# Altium PCB IndAlarmIf2.PCBDOC (part 1 of 2)
Units mil, origin at the board's own origin, x right, y up, seen from the top; angles counter-clockwise.
Board outline 5790 x 4460 mil, 2 copper layers (Top Layer, Bottom Layer); 118 components, 184 nets, 640 pads, 242 vias.
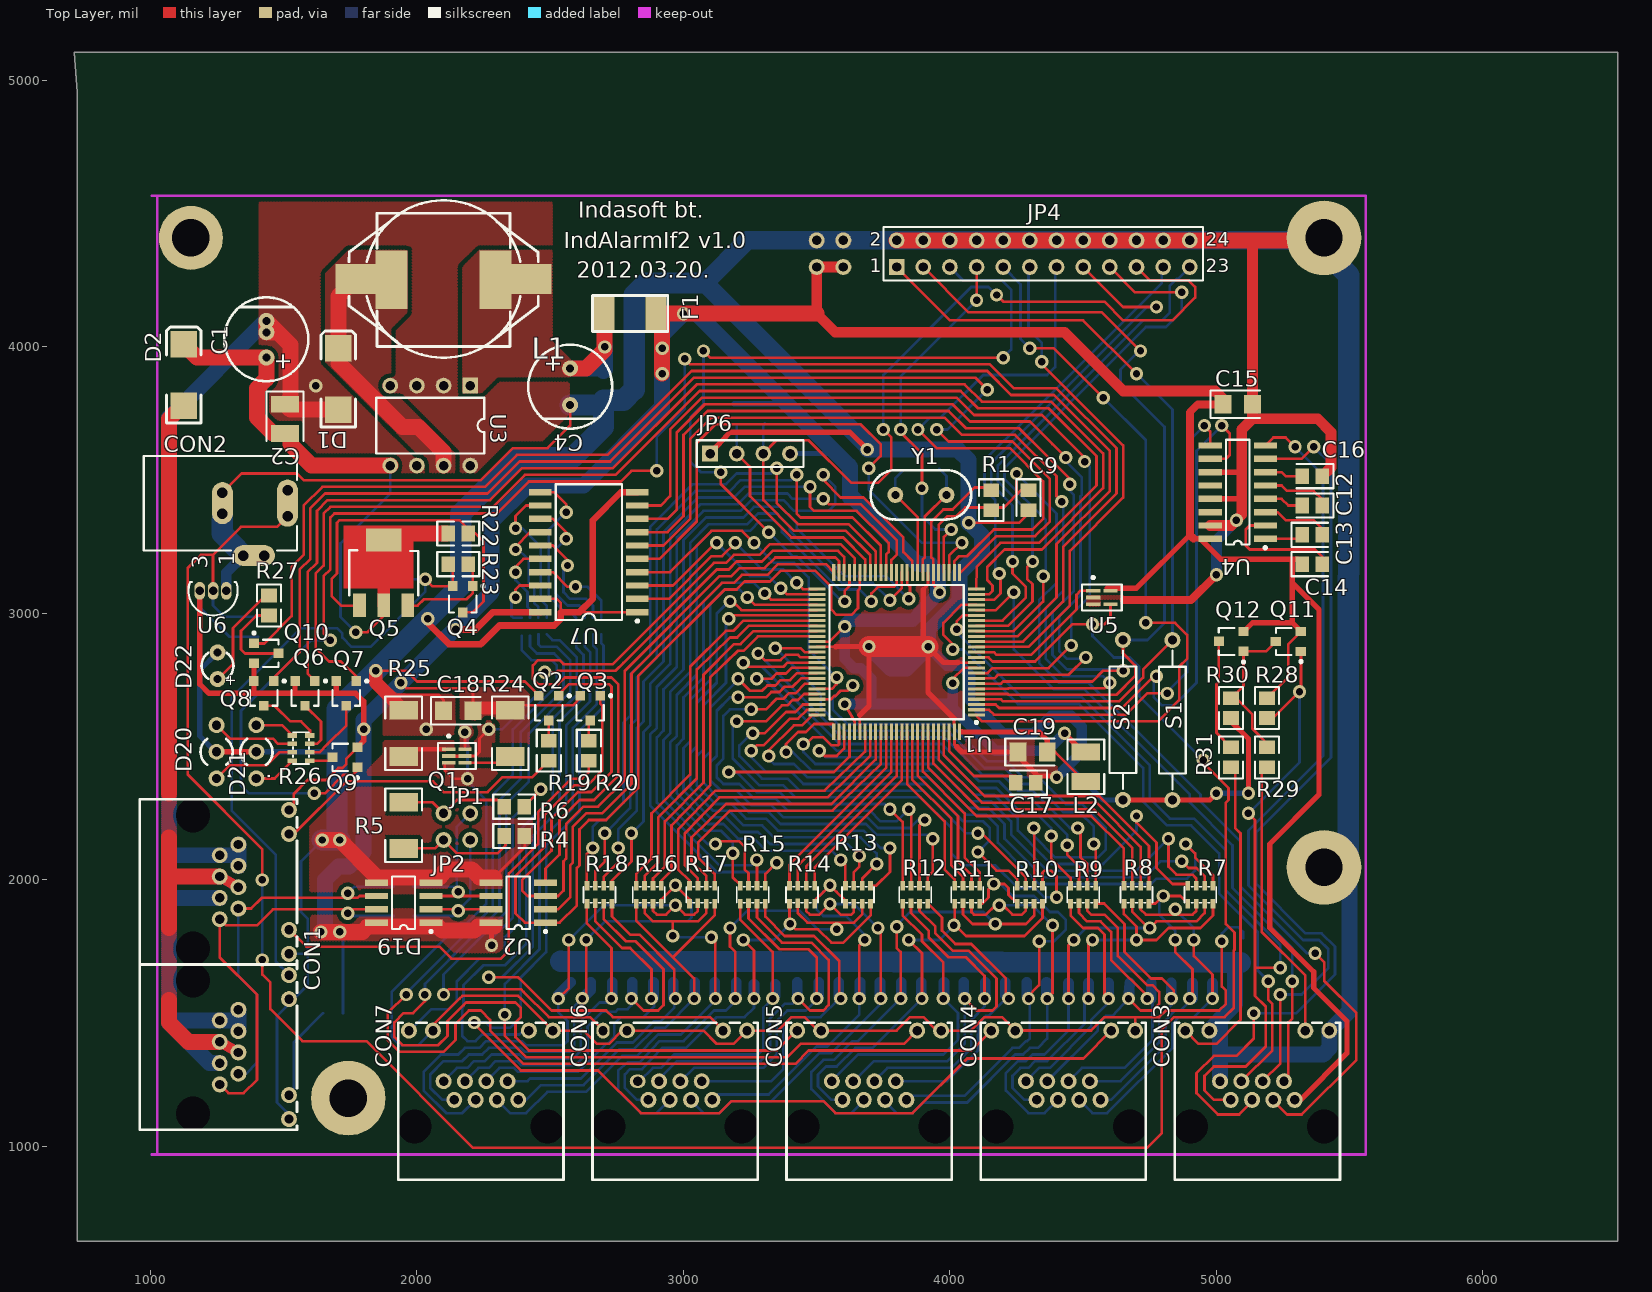
[diagram p0: Top Layer view]
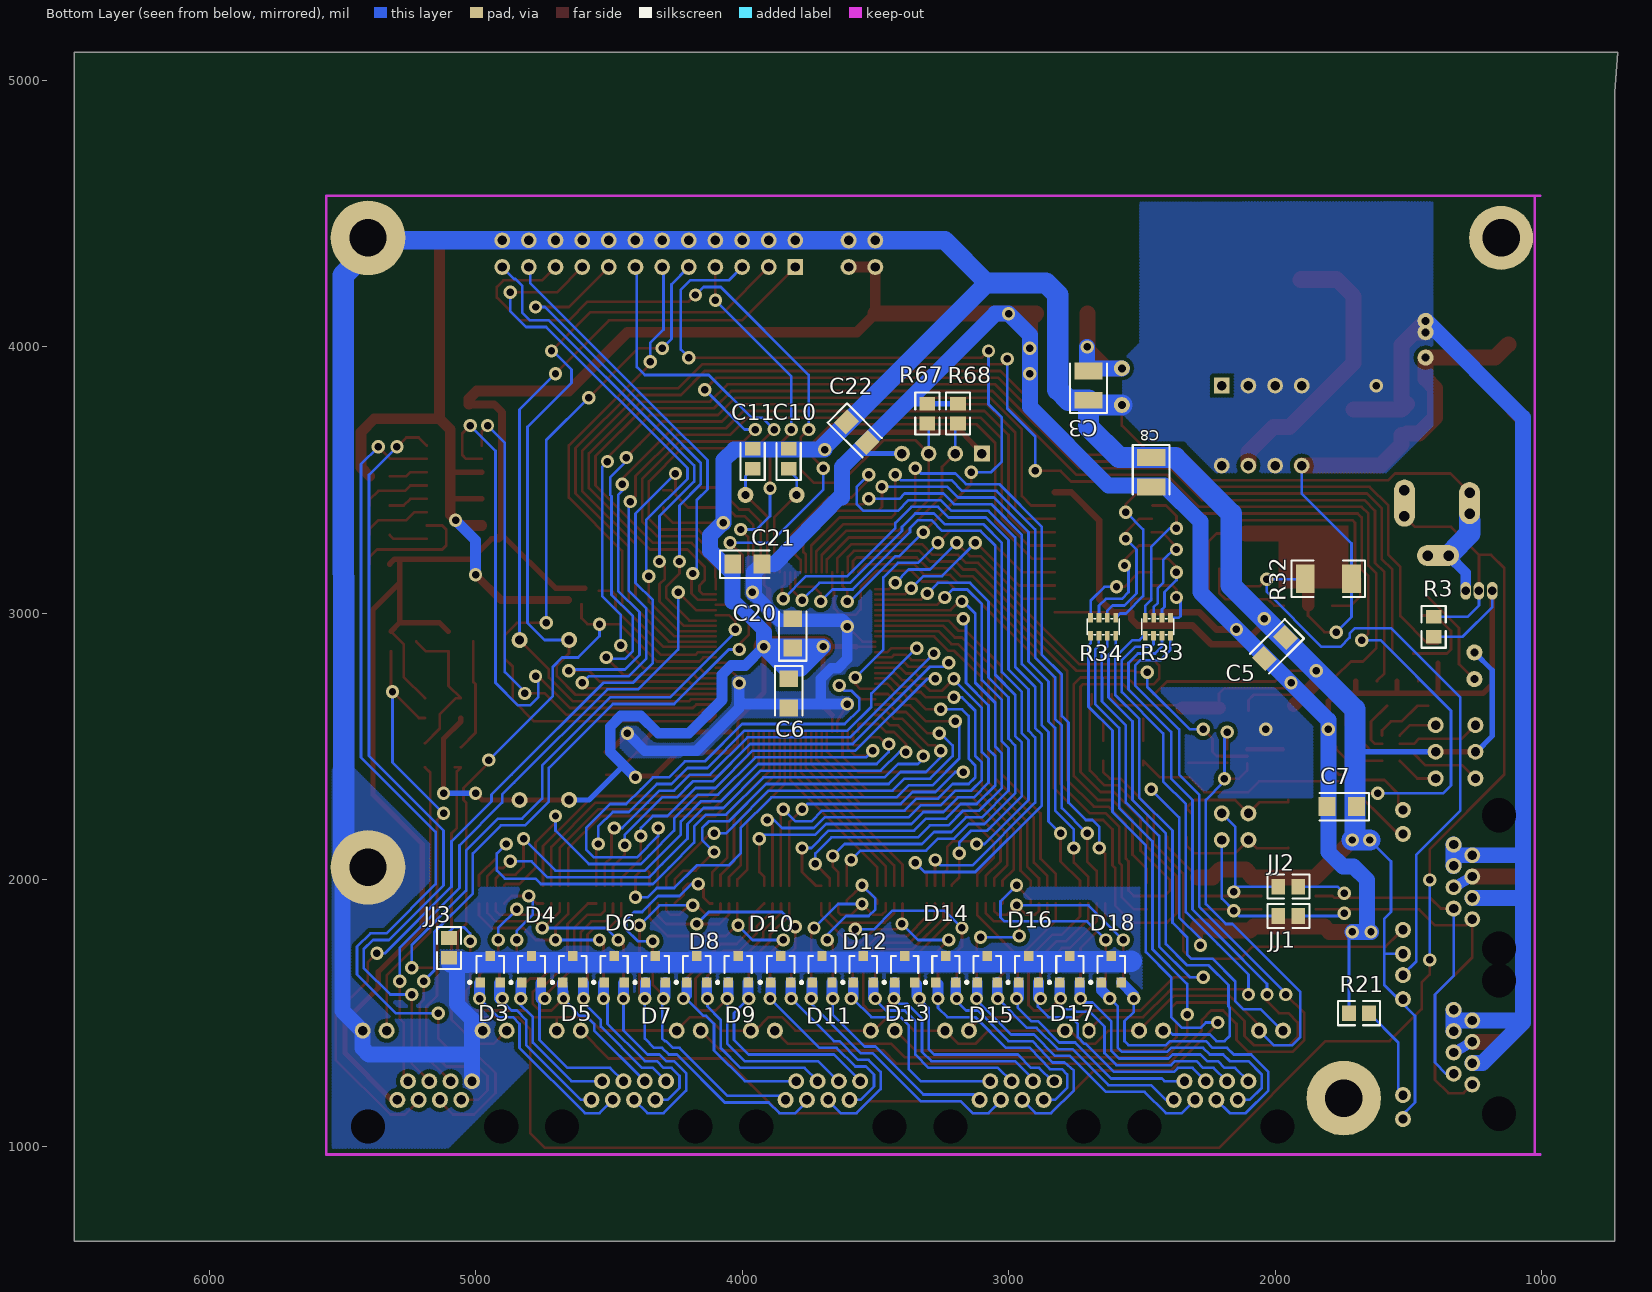
[diagram p1: Bottom Layer view, seen from below]

## Layer stack, top to bottom
Top Layer: signal copper 1.4
Dielectric: dielectric 12.6, FR-4, Dk 4.8
Bottom Layer: signal copper 1.4

## Board outline
725,4955 725,645 6505,645 6505,5105 715,5105

## Design rules (kind name [scope] priority, off if disabled: settings)
Clearance ClearanceMCU [All] p1: gap=7.5
Clearance Clearance_FILL [All] p2 off: gap=15
Clearance [All] p3 off: gap=10
ComponentClearance [All] p1: gap=10 collisioncheckmode=0
HoleSize [All] p1: absolutevalues=TRUE maxlimit=200 minlimit=1 maxpercent=80.000 minpercent=20.000
PlaneConnect [All] p1: planeconnectstyle=Direct reliefexpansion=20 reliefentries=4 reliefconductorwidth=10 reliefairgap=10
PolygonConnect [All] p1: connectstyle=Direct reliefconductorwidth=10 reliefentries=4 polygonreliefangle="90 Angle"
RoutingLayers [All] p1: top layer=Horizontal bottom layer=Vertical
RoutingVias [All] p1: holewidth=28 width=50 viastyle="Through Hole" minholewidth=28 minwidth=50 maxholewidth=28 maxwidth=50
SolderMaskExpansion [All] p1: expansion=4
TestPointUsage [All] p1: valid=0 allowmultiple=FALSE
Testpoint [All] p1: side=15 testpointundercomponent=TRUE minsize=40 maxsize=100 preferedsize=60 minholesize=0 maxholesize=40 preferedholesize=32 testpointgrid=1 style=1023 order=1234567890
UnConnectedPin [All] p1 off:
Width Power [InNetClass('Power')] p1: maxlimit=100 minlimit=10 preferedwidth=10 toplayer_prefwidth=30 bottomlayer_prefwidth=20 minimp=50.000000 maximp=50.000000 favimp=50.000000
Width [All] p2: maxlimit=40 minlimit=10 preferedwidth=10 minimp=50.000000 maximp=50.000000 favimp=50.000000
14 further rules are at their usual default settings.

## Classes and differential pairs
net class Power: GND NetC3_2 NetD1_2 U+ UIN VCC

## Components (designator, comment, footprint, x,y, rotation, side; value= is the part's Value field where it differs from the comment)
C1 "Cap Pol1" C8X11RM3.5 1435,3960 r90 top
C2 "Cap Semi" CC3225-1210 1505,3730 r270 top
C3 "Cap Semi" CC3225-1210 2700,3855 r90 bottom
C4 "Cap Pol1" C8X11RM3.5 2575,3920 r270 top
C5 "Cap Semi" CC3216-1206 2000,2870 r315 bottom
C6 "Cap Semi" CC3216-1206 3825,2700 r270 bottom
C7 "Cap Semi" CC3216-1206 1750,2275 r0 bottom
C8 "Cap Semi" CC3225-1210 2465,3530 r270 bottom
C9 "Cap Semi" CC2012-0805 4295,3425 r270 top
C10 "Cap Semi" CC2012-0805 3825,3580 r90 bottom
C11 "Cap Semi" CC2012-0805 3960,3580 r90 bottom
C12 "Cap Semi" CC2012-0805 5360,3405 r180 top
C13 "Cap Semi" CC2012-0805 5360,3295 r0 top
C14 "Cap Semi" CC2012-0805 5360,3185 r0 top
C15 "Cap Semi" CC3216-1206 5080,3785 r0 top
C16 "Cap Semi" CC2012-0805 5360,3515 r180 top
C17 "Cap Semi" CC2012-0805 4285,2365 r180 top
C18 "Cap Semi" CC3216-1206 2155,2635 r0 top
C19 "Cap Semi" CC3216-1206 4310,2480 r0 top
C20 "Cap Semi" CC3216-1206 3810,2925 r90 bottom
C21 "Cap Semi" CC3216-1206 3980,3185 r180 bottom
C22 "Cap Semi" CC3216-1206 3570,3680 r225 bottom
CON1 "RJ45U_2LED_2" RJHS-508X-2 1160,1992.76 r270 top locked
CON2 "1-Wire" KLD-0202 975,3414.02 r0 top locked
CON3 "RJHSE-5084" RJHS-508X#1 5153.54,1074.8 r0 top locked
CON4 "RJ45" RJHS-508X#1 4425.2,1074.8 r0 top locked
CON5 "RJ45" RJHS-508X#1 3696.85,1074.8 r0 top locked
CON6 "RJ45" RJHS-508X#2 2968.5,1074.8 r0 top locked
CON7 "RJ45" RJHS-508X#1 2240.16,1074.8 r0 top locked
D1 "LL5819" MELF 1705,3995 r90 top
D2 "LL5819" MELF 1125,4010 r90 top
D3 "ESDA6V1L" SO-G3/C2.5 4945,1665 r180 bottom
D4 "ESDA6V1L" SO-G3/C2.5 4790,1665 r180 bottom
D5 "ESDA6V1L" SO-G3/C2.5 4635,1665 r180 bottom
D6 "ESDA6V1L" SO-G3/C2.5 4480,1665 r180 bottom
D7 "ESDA6V1L" SO-G3/C2.5 4325,1665 r180 bottom
D8 "ESDA6V1L" SO-G3/C2.5 4170,1665 r180 bottom
D9 "ESDA6V1L" SO-G3/C2.5 4015,1665 r180 bottom
D10 "ESDA6V1L" SO-G3/C2.5 3855,1665 r180 bottom
D11 "ESDA6V1L" SO-G3/C2.5 3700,1665 r180 bottom
D12 "ESDA6V1L" SO-G3/C2.5 3545,1665 r180 bottom
D13 "ESDA6V1L" SO-G3/C2.5 3390,1665 r180 bottom
D14 "ESDA6V1L" SO-G3/C2.5 3235,1665 r180 bottom
D15 "ESDA6V1L" SO-G3/C2.5 3080,1665 r180 bottom
D16 "ESDA6V1L" SO-G3/C2.5 2925,1665 r180 bottom
D17 "ESDA6V1L" SO-G3/C2.5 2770,1665 r180 bottom
D18 "ESDA6V1L" SO-G3/C2.5 2615,1665 r180 bottom
D19 "USB6B1" NSO8 1950,1915 r90 top
D20 "LED" "LED3MM - 2" 1248.03,2480.95 r90 top locked
D21 "LED" "LED3MM - 2" 1397.64,2480.95 r90 top locked
D22 "LED" LED3MM 1251.97,2803.78 r90 top locked
F1 "500mA" MINIFUSE 2800,4125 r0 top
JJ1 "" CR2012-0805 1950,1865 r0 bottom
JJ2 "" CR2012-0805 1950,1975 r0 bottom
JJ3 "" CR2012-0805 5100,1745 r90 bottom
JP1 "Jumper" JP 2100,2250 r0 top
JP2 "Jumper" JP 2200,2150 r180 top
JP4 "Header 12X2" HDR2X12 3800,4300 r0 top
JP6 "IIC" HDR1X4 3100,3600 r0 top
L1 "Inductor" "SSL1306T - NPI27H" 2100,4255 r0 top
L2 "Inductor" CR3225-1210 4510,2425 r270 top
Q1 "Si1539" SOT363 2150,2465 r270 top
Q2 "MMUN2211" SOT-23 2495,2645 r180 top
Q3 "MMUN2111" SOT-23 2650,2645 r180 top
Q4 "BC847C" 318-08 2171.61,3053.39 r180 top
Q5 "BCP55" SOT223 1875,3275 r0 top
Q6 "MMUN2111" SOT-23 1580,2700 r180 top
Q7 "MMUN2111" SOT-23 1735,2700 r180 top
Q8 "MMUN2111" SOT-23 1425,2700 r180 top
Q9 "MMUN2111" SOT-23 1730,2460 r90 top
Q10 "MMUN2111" SOT-23 1435,2850 r270 top
Q11 "BSS84LT1" SOT23 5270,2895 r90 top
Q12 "MMUN2111" SOT-23 5055,2895 r90 top
R1 "Res Semi" CR2012-0805 4155,3425 r90 top
R3 "Res Semi" CR2012-0805 1405,2950 r270 bottom
R4 "Res Semi" CR2012-0805 2365,2165 r180 top
R5 "Res Semi" CR5025-2010 1950,2205 r90 top
R6 "Res Semi" CR2012-0805 2365,2275 r180 top
R7 "470" YC164 4940,1945 r0 top
R8 "470" YC164 4700,1945 r180 top
R9 "22" YC164 4500,1945 r180 top
R10 "470" YC164 4300,1945 r0 top
R11 "470" YC164 4065,1945 r180 top
R12 "22" YC164 3870,1945 r180 top
R13 "470" YC164 3655,1945 r0 top
R14 "470" YC164 3445,1945 r180 top
R15 "22" YC164 3260,1945 r180 top
R16 "470" YC164 2870,1945 r0 top
R17 "470" YC164 3070,1945 r180 top
R18 "22" YC164 2685,1945 r180 top
R19 "470" CR2012-0805 2495,2485 r90 top
R20 "470" CR2012-0805 2645,2485 r90 top
R21 "680" CR2012-0805 1685,1500 r0 bottom
R22 "2k2" CR2012-0805 2155,3300 r180 top
R23 "68" CR2012-0805 2155,3185 r0 top
R24 "Res Semi" CR5025-2010 2350,2550 r90 top
R25 "Res Semi" CR5025-2010 1950,2550 r270 top
R26 "330" YC164 1565,2495 r270 top
R27 "Res Semi" CR2012-0805 1445,3030 r270 top
R28 "Res Semi" CR2012-0805 5190,2645 r90 top
R29 "Res Semi" CR2012-0805 5190,2460 r90 top
R30 "Res Semi" CR2012-0805 5055,2645 r90 top
R31 "Res Semi" CR2012-0805 5055,2460 r90 top
R32 "Res Semi" CR5025-2010 1800,3130 r0 bottom
R33 "220" YC164 2440,2950 r0 bottom
R34 "220" YC164 2645,2950 r0 bottom
R67 "Res Semi" CR2012-0805 3305,3750 r90 bottom
R68 "Res Semi" CR2012-0805 3190,3750 r90 bottom
S1 "SW-SPST" AXIAL-0.6 4835,2600 r270 top
S2 "SW-SPST" AXIAL-0.6 4649.28,2600.72 r270 top
U1 "*" TQFP100 3800,2855 r180 top
U2 "MAX1487CSA" NSO8 2380,1915 r90 top
U3 "LM2574N-5" 626-05 2050,3705 r180 top
U4 "DS232AR-N" SOIC16N 5080,3455 r90 top
U5 "74AHC1G125" SOT353 4570,3060 r270 top
U6 "DS18S20" PR35 1235,3085 r90 top
U7 "SN74HC540DW" DW020 2645,3230 r90 top
Y1 "XTAL" HC49 3795,3445 r0 top

## Footprints (in the part's own frame and the unit in brackets; to place one, negate y for a bottom-side part, rotate by r counter-clockwise, add the part's x,y. Pads: shape width x height; smd on the part's side, far side on the other; paste and mask are expansions set on the pad)
318-08 [mm] "SOT-23; 3 Leads; Body 3.0 x 2.6 mm, inc. leads (LxW max)"
  rect 0.9x0.95 smd: 1(-0.95,-1.25) 2(0.95,-1.25) 3(0,1.25)
  silkscreen extent -2.08,-1.37 1.3,1.25
626-05 [mm] "DIP; 8 Leads; Row Spacing 7.62 mm; Pitch 2.54 mm"
  rect 1.5x1.5 hole 0.9: 1(-3.81,-3.81)
  round 1.5 hole 0.9: 2(-1.27,-3.81) 3(1.27,-3.81) 4(3.81,-3.81) 5(3.81,3.81) 6(1.27,3.81) 7(-1.27,3.81) 8(-3.81,3.81)
  silkscreen extent -5.15,-2.65 5.15,2.65
AXIAL-0.6 [mil]
  round 60 hole 33.47: 1(-300,0) 2(300,0)
  silkscreen extent -260,-50 260,50
C8X11RM3.5 [mil]
  round 60 hole 30: 1(0,0) 2(137.8,0)
  silkscreen extent -89,-157 226,157
CC2012-0805 [mm]
  rect 1.3x1.5 smd: 1(-0.95,0) 2(0.95,0)
  silkscreen extent -2,-1.15 1.5,1.15
CC3216-1206 [mm]
  rect 1.6x1.8 smd: 1(-1.4,0) 2(1.4,0)
  silkscreen extent -2.6,-1.3 2.1,1.3
CC3225-1210 [mm]
  rect 1.6x2.7 smd: 1(-1.4,0) 2(1.4,0)
  silkscreen extent -2.6,-1.75 2.1,1.75
CR2012-0805 [mm]
  rect 1.3x1.5 smd: 1(-0.95,0) 2(0.95,0)
  silkscreen extent -2,-1.15 2,1.15
CR3225-1210 [mm]
  rect 1.6x2.7 smd: 1(-1.4,0) 2(1.4,0)
  silkscreen extent -2.6,-1.75 2.6,1.75
CR5025-2010 [mm]
  rect 1.8x2.7 smd: 1(-2.2,0) 2(2.2,0)
  silkscreen extent -3.5,-1.75 3.5,1.75
DW020 [mm] "Plastic Small Outline; 20 Leads; Body Width 7.5 mm"
  rect 0.6x2.15 smd: 1(-5.715,-4.625) 2(-4.445,-4.625) 3(-3.175,-4.625) 4(-1.905,-4.625) 5(-0.635,-4.625) 6(0.635,-4.625) 7(1.905,-4.625) 8(3.175,-4.625) 9(4.445,-4.625) 10(5.715,-4.625) 11(5.715,4.625) 12(4.445,4.625) 13(3.175,4.625) 14(1.905,4.625) 15(0.635,4.625) 16(-0.635,4.625) 17(-1.905,4.625) 18(-3.175,4.625) 19(-4.445,4.625) 20(-5.715,4.625)
  silkscreen extent -6.69,-4.75 6.47,3.15
HC49 [mil]
  round 60 hole 30: 1(0,0) 2(192.13,0)
  silkscreen extent -93,-93 285,93
HDR1X4 [mm] "Connector; Header; 4 Position"
  rect 1.5x1.5 hole 0.9: 1(0,0)
  round 1.5 hole 0.9: 2(2.54,0) 3(5.08,0) 4(7.62,0)
  silkscreen extent -1.27,-1.27 8.89,1.27
HDR2X12 [mm] "Connector; Header; 12x2 Position"
  rect 1.5x1.5 hole 0.9: 1(0,0)
  round 1.5 hole 0.9: 2(0,2.54) 3(2.54,0) 4(2.54,2.54) 5(5.08,0) 6(5.08,2.54) 7(7.62,0) 8(7.62,2.54) 9(10.16,0) 10(10.16,2.54) 11(12.7,0) 12(12.7,2.54) 13(15.24,0) 14(15.24,2.54) 15(17.78,0) 16(17.78,2.54) 17(20.32,0) 18(20.32,2.54) 19(22.86,0) 20(22.86,2.54) 21(25.4,0) 22(25.4,2.54) 23(27.94,0) 24(27.94,2.54)
  silkscreen extent -1.27,-1.27 29.21,3.81
JP [mil]
  round 60 hole 35: 1(0,0) 2(100,0)
KLD-0202 [mm] "DC Power Jack, 2.5mm, KLD Series, PCB Mount"
  oval 2x4.5 all layers, no hole: 1(13.7,0)
  round 1.5 hole 1: 1A(13.7,-1.25) 1B(13.7,1.25) 2A(7.5,-1) 2B(7.5,1) 3A(9.5,-5) 3B(11.5,-5)
  oval 2x4 all layers, no hole: 2(7.5,0)
  oval 4x2 all layers, no hole: 3(10.5,-5)
  silkscreen extent 0,-4.5 14.6,4.5
LED3MM [mil]
  round 60 hole 30: 1(-50,0) 2(50,0)
  silkscreen extent -49,-60 48,60
"LED3MM - 2" [mil]
  round 60 hole 35: 1(-100,0) 2(100,0) 3(0,0)
  silkscreen extent -49,-61 48,60
MELF [mil]
  rect 100x100 smd: 1(-230,0) 2(0,0)
  silkscreen extent -295,-65 65,65
MINIFUSE [mil]
  rect 77x124 smd: 1(-96.5,0) 2(96.5,0)
  silkscreen extent -141,-67 141,68
NSO8 [mm] "Small Outline; 8 Leads; Body Width 3.9 mm; Pitch 1.27 mm"
  rect 0.6x2.2 smd: 1(-1.905,-2.6) 2(-0.635,-2.6) 3(0.635,-2.6) 4(1.905,-2.6) 5(1.905,2.6) 6(0.635,2.6) 7(-0.635,2.6) 8(-1.905,2.6)
  silkscreen extent -2.88,-2.72 2.5,1.1
PR35 [mm] "TO, Flat Index; 3 In-Line, Axial Leads; Body Dia. 4.6mm; Leads 0.56 x 0.51 mm (max)"
  oval 1.7x1 hole 0.8: 1(0,-1.27) 2(0,0) 3(0,1.27)
  silkscreen extent -2.34,-2.35 0.85,2.35
RJHS-508X#1 [mil] "RJ45 2 LED"
  round 0 hole 128: 0(-250,0) 0(250,0)
  round 60 hole 35: 1(140,100) 2(100,170) 3(60,100) 4(20,170) 5(-20,100) 6(-60,170) 7(-100,100) 8(-140,170) 9(270,360) 10(180,360) 11(-180,360) 12(-270,360)
  silkscreen extent -310,-200 310,390
RJHS-508X#2 [mil] "RJ45 2 LED"
  round 0 hole 128: 0(-250,0) 0(250,0)
  round 60 hole 35: 1(140,100) 2(100,170) 3(60,100) 4(20,170) 5(-20,100) 6(-60,170) 7(-100,100) 9(270,360) 10(180,360)
  oval 60x50 hole 35: 8(-140,170)
  oval 60x55 hole 35: 11(-180,360)
  oval 50x60 hole 35: 12(-270,360)
  silkscreen extent -310,-200 310,390
RJHS-508X-2 [mil]
  round 0 hole 128: 0(-250,0) 0(250,0) 0(370,0) 0(870,0)
  round 60 hole 35: 1(140,100) 1B(760,100) 2(100,170) 2B(720,170) 3(60,100) 3B(680,100) 4(20,170) 4B(640,170) 5(-20,100) 5B(600,100) 6(-60,170) 6B(560,170) 7(-100,100) 7B(520,100) 8(-140,170) 8B(480,170) 9(270,360) 9B(890,360) 10(180,360) 10B(800,360) 11(-180,360) 11B(440,360) 12(-270,360) 12B(350,360)
  silkscreen extent -310,-200 930,390
SO-G3/C2.5 [mm]
  rect 0.9x0.95 smd: 1(-0.95,-1.25) 2(0.95,-1.25) 3(0,1.25)
  silkscreen extent -2.08,-1.37 1.3,1.25
SOIC16N [mm] "Small Outline; 16 Leads; Body Width 3.9 mm; Pitch 1.27 mm"
  rect 0.6x2.2 smd: 1(-4.445,-2.625) 2(-3.175,-2.625) 3(-1.905,-2.625) 4(-0.635,-2.625) 5(0.635,-2.625) 6(1.905,-2.625) 7(3.175,-2.625) 8(4.445,-2.625) 9(4.445,2.625) 10(3.175,2.625) 11(1.905,2.625) 12(0.635,2.625) 13(-0.635,2.625) 14(-1.905,2.625) 15(-3.175,2.625) 16(-4.445,2.625)
  silkscreen extent -5.42,-2.75 5,1.13
SOT23 [mm] "SOT-23; 3 Leads; Body 3.0 x 2.5 mm, inc. leads (LxW max)"
  rect 0.85x1 smd: 1(-0.95,-1.2) 2(0.95,-1.2) 3(0,1.2)
  silkscreen extent -2.05,-1.32 1.28,1.2
SOT223 [mm]
  rect 1.2x2.2 smd: 1(-2.3,-6.2) 2(0,-6.2) 3(2.3,-6.2)
  rect 3.4x2.2 smd: 2(0,0)
  silkscreen extent -3.28,-5.28 3.3,-0.97
SOT353 [mm] "SOT-353/SC-88A; 5 Leads; Body 2.2 x 2.2 mm, inc. leads (LxW max)"
  rect 0.35x1.35 smd: 1(-0.65,-0.825) 2(0,-0.825) 3(0.65,-0.825) 4(0.65,0.825) 5(-0.65,0.825)
  silkscreen extent -2.02,-1.9 1.25,1.9
SOT363 [mm] "SOT-363/SC-88; 6 Leads; Body 2.2 x 2.2 mm, inc. leads (LxW max)"
  rect 0.35x1.25 smd: 1(-0.65,-0.775) 2(0,-0.775) 3(0.65,-0.775) 4(0.65,0.775) 5(0,0.775) 6(-0.65,0.775)
  silkscreen extent -2.02,-1.8 1.25,1.8
SOT-23 [mm] "SOT-23; 3 Leads; Body 3.1 x 2.5 mm, inc. leads (LxW max)"
  rect 0.9x0.95 smd: 1(-0.95,-1.175) 2(0.95,-1.175) 3(0,1.175)
  silkscreen extent -2.07,-1.3 1.3,1.18
"SSL1306T - NPI27H" [mil]
  rect 150x114.17 smd: 1(-330,0) 2(330,0)
  rect 120x220 smd: 1(-195,-3) 2(195,-3)
  silkscreen extent -355,-295 356,295
TQFP100 [mm] "100-Pin Plastic Thin Quad Flat Pack (TQFP)"
  rect 1.6x0.3 smd: 1(-7.6,6) 2(-7.6,5.5) 3(-7.6,5) 4(-7.6,4.5) 5(-7.6,4) 6(-7.6,3.5) 7(-7.6,3) 8(-7.6,2.5) 9(-7.6,2) 10(-7.6,1.5) 11(-7.6,1) 12(-7.6,0.5) 13(-7.6,0) 14(-7.6,-0.5) 15(-7.6,-1) 16(-7.6,-1.5) 17(-7.6,-2) 18(-7.6,-2.5) 19(-7.6,-3) 20(-7.6,-3.5) 21(-7.6,-4) 22(-7.6,-4.5) 23(-7.6,-5) 24(-7.6,-5.5) 25(-7.6,-6) 51(7.6,-6) 52(7.6,-5.5) 53(7.6,-5) 54(7.6,-4.5) 55(7.6,-4) 56(7.6,-3.5) 57(7.6,-3) 58(7.6,-2.5) 59(7.6,-2) 60(7.6,-1.5) 61(7.6,-1) 62(7.6,-0.5) 63(7.6,0) 64(7.6,0.5) 65(7.6,1) 66(7.6,1.5) 67(7.6,2) 68(7.6,2.5) 69(7.6,3) 70(7.6,3.5) 71(7.6,4) 72(7.6,4.5) 73(7.6,5) 74(7.6,5.5) 75(7.6,6)
  rect 0.3x1.6 smd: 26(-6,-7.6) 27(-5.5,-7.6) 28(-5,-7.6) 29(-4.5,-7.6) 30(-4,-7.6) 31(-3.5,-7.6) 32(-3,-7.6) 33(-2.5,-7.6) 34(-2,-7.6) 35(-1.5,-7.6) 36(-1,-7.6) 37(-0.5,-7.6) 38(0,-7.6) 39(0.5,-7.6) 40(1,-7.6) 41(1.5,-7.6) 42(2,-7.6) 43(2.5,-7.6) 44(3,-7.6) 45(3.5,-7.6) 46(4,-7.6) 47(4.5,-7.6) 48(5,-7.6) 49(5.5,-7.6) 50(6,-7.6) 76(6,7.6) 77(5.5,7.6) 78(5,7.6) 79(4.5,7.6) 80(4,7.6) 81(3.5,7.6) 82(3,7.6) 83(2.5,7.6) 84(2,7.6) 85(1.5,7.6) 86(1,7.6) 87(0.5,7.6) 88(0,7.6) 89(-0.5,7.6) 90(-1,7.6) 91(-1.5,7.6) 92(-2,7.6) 93(-2.5,7.6) 94(-3,7.6) 95(-3.5,7.6) 96(-4,7.6) 97(-4.5,7.6) 98(-5,7.6) 99(-5.5,7.6) 100(-6,7.6)
  silkscreen extent -7.73,-6.4 6.4,6.82
YC164 [mm] "YC164 Chip Resistor array"
  rect 0.45x0.9 smd: 1(-1.2,-0.85) 2(-0.4,-0.85) 3(0.4,-0.85) 4(1.2,-0.85) 5(1.2,0.85) 6(0.406,0.838) 7(-0.4,0.85) 8(-1.2,0.85)
  silkscreen extent -1.52,-0.76 1.52,0.76

## Part data
C1 C4: "Polarized Capacitor (Radial)"
C2 C3 C5 C6 C7 C8 C9 C10 C11 C12 C13 C14 C15 C16 C17 C18 C19 C20 C21 C22: "Capacitor (Semiconductor SIM Model)"
CON2: library part PWR2.5, "Low Voltage Power Supply Connector"
CON3: library part RJ45
D1 D2: library part "D Schottky", "Schottky Diode"
D3 D4 D5 D9 D10 D11 D12 D13 D14 D15 D16 D17 D18: "DUAL TRANSIL ARRAY / FOR ESD PROTECTION"
D6: library part USB6B1
D7 D8: library part LED3, "Typical BLUE SiC LED"
D20 D21: library part 2LED_A
D22: library part LED12
F1: library part "Fuse 1", "Fuse"
JJ1 JJ2 JJ3 R7 R8 R9 R10 R11 R12 R13 R14 R15 R16 R17 R18 R19 R20 R21 R22 R23 R26: library part "Res Semi", "Semiconductor Resistor"
JP1 JP2: "Jumper Wire"
JP4: library part "Header 13X2", "Header, 13-Pin, Dual row"
JP6: library part "Header 4", "Header, 4-Pin"
Q2: library part NPNR1, "NPN Transistor"
Q3 Q6 Q7 Q8 Q9 Q10 Q12: library part PNPR1, "NPN Transistor"
Q4: library part BC847ALT1, "General Purpose Transistor NPN Silicon"
Q5: "NPN Medium Power Transistor"
Q11: library part BSS84AKS
R1 R3 R4 R5 R6 R24 R25 R27 R28 R29 R30 R31 R32 R67 R68: "Semiconductor Resistor"
R33 R34: library part RES4
S1 S2: "Single-Pole, Single-Throw Switch"
U1: library part ATMEGA1280
U2: "Low-Power, Slew-Rate-Limited RS-485/RS-422 Transceiver"
U3: "Easy Switcher 0.5A Step-Down Voltage Regulator"
U4: "Dual RS-232 Transmitter/Receiver"
U6: library part DS1820, "1-Wire Digital Thermometer"
U7: library part 74AHC1G125
Y1: "Crystal Oscillator"

## Free pads (board coordinates)
  round 240 hole 140: 0(1151.73,4409.45)
  round 60 hole 30: 0(1435,4055)
  round 280 hole 140: 0(1742.28,1181.1) 0(5403.7,2047.24) 0(5403.7,4409.45)
  round 60 hole 35.43: 0(3600,4400) 1(3500,4400) 2(3500,4300) 3(3600,4300)

## Via types
v1: diameter 50, hole 28, Top Layer to Bottom Layer, 242 vias

## Nets (pads, with @x,y where several pads share a name; then routed paths per layer and width w, separated by ;. In a path a pad name is that pad's centre, name@x,y a point inside that pad or via, vN(x,y) a via of type N, cw(c..) or ccw(c..) an arc to the next point about the centre after c; other vN are vias at no path point)
GND: C1.2 C2.1 C3.1 C4.2 C5.1 C6.1 C7.1 C8.1 C9.2 C10.2 C11.2 C15.2 C16.1 C17.1 C18.1 C19.1 C20.1 C21.1 C22.1 CON1.0@1160,1622.76 CON1.0@1160,1742.76 CON1.0@1160,2242.76 CON1.3 CON1.3B CON1.6 CON1.6B CON1.7 CON1.7B CON1.8 CON1.8B CON1.9 CON1.9B CON1.11B CON2.2 CON2.2A CON2.2B CON2.3 CON2.3A CON2.3B CON3.0@5403.54,1074.8 CON3.8 CON3.9 CON3.11 D1.1 D3.3 D4.3 D5.3 D6.3 D7.3 D8.3 D9.3 D10.3 D11.3 D12.3 D13.3 D14.3 D15.3 D16.3 D17.3 D18.3 D19.4 D19.5 D20.3 D21.3 D22.2 JJ3.1 JP4.2 JP4.4 JP4.6 JP4.8 JP4.10 JP4.12 JP4.14 JP4.16 JP4.18 JP4.20 JP4.22 JP4.24 JP6.1 pad.0@1435,4055 pad.0@3600,4400 pad.0@5403.7,2047.24 pad.0@5403.7,4409.45 pad.1 Q2.2 R4.1 R25.1 R30.1 S1.2 S2.2 U1.11 U1.32 U1.62 U1.81 U1.99 U2.5 U3.2 U3.3 U3.4 U3.6 U3.8 U4.11 U4.13 U4.15 U5.2 U5.3 U6.1 U7.1 U7.10 U7.19 | length 36821.8
  Top Layer w10: CON2.2B@1270.28,3453.39 1341.89,3525 1550,3525 1575,3500 2240,3500 2360,3620 2490,3620 2575,3705 C4.2@2575,3782.2 ; v1(1845,2785) 1960,2785 2000,2745 2405,2745 2453.74,2696.26 Q2.2@2457.6,2696.26 ; 1885,2695 2080,2695 2099.88,2675.12 C18.1@2099.88,2635 ; 2290,2010 2320,2040 2405,2125 2405,2130 R4.1@2405,2162.4 ; U7.19@2462.91,3055 2525,3055 2540,3040 2540,3005 ; 2610,3005 U7.1@2827.09,3005 ; U1.62@3500.79,2874.68 3571,2875 ; U1.81@3662.2,2555.79 3662.2,2619.09 ; 3900,2893.11 v1(3918.11,2875) v1@3917.8,2874.68 ; 4016.53,2508.47 4025,2500 ; 4032,2816 U1.11@4099.21,2815.63 ; v1(4070,3340) 4260,3340 4295,3375 C9.2@4295,3397.6 ; S1.2@4835,2280 S1.2@4835,2300 ; pad.0@5363.78,4400 pad.0@5393.7,4370.08
  Top Layer w11: 3900,3090 3918.11,3108.11 U1.32@3918.11,3154.21 ; 4016,2606 U1.99@4016.54,2555.79 4016.53,2508.47
  Top Layer w20: D20.3@1248.03,2480.95 D21.3@1397.64,2480.95 ; JP6.1@3100,3600 3175,3680 3625,3680 v1(3690,3615) ; 3571,2875 v1(3696,2876) 3696,2652.89 3662.2,2619.09 ; 3900,2893.11 3900,3090 ; 4016,2606 3917.8,2704.2 3917.8,2874.68 3976.48,2816 4032,2816 ; 4025,2500 4045,2480 C19.1@4265,2480 ; C19.1@4254.88,2480 4254.88,2465.12 4322.4,2397.6 4322.4,2390 4390,2390 v1@4400,2400 ; S2.2@4650,2300 S1.2@4835,2300 4975,2300 v1(5000,2325) ; U4.13@4976.65,3430 5095,3430 ; U4.11@4976.65,3530 5095,3530 ; R30.1@5055,2607.6 5055,2595 5120,2530 v1(5120,2325)
  Top Layer w25: v1(2040,2980) 2040,2965 2120,2885 2240,2885 2310,2955 2515,2955 2540,2980 2540,3005 2610,3005 2660,3055 2660,3350 2765,3455 U7.10@2827.09,3455
  Top Layer w30: 4654.06,3050 4905,3050 v1(5000,3145)
  Top Layer w40: U4.15@4976.65,3330 5055,3330 5095,3370 5095,3690 5135.12,3730.12 ; 5135.12,4399.88 C15.2@5135.12,3785 5135.12,3730.12 ; C16.1@5397.4,3515 5430,3547.6 5430,3680 5379.88,3730.12 5135.12,3730.12
  Top Layer w50: v1(1845,2785) 1845,2740.84 R25.1@1930.88,2654.96
  Top Layer w60: 1478.14,4054.66 1435.34,4054.66 pad.0@1435,4055 C1.2@1435,4097.8 1525,4007.8 1525,3805.12 C2.1@1505,3785.12 1525.12,3765 D1.1@1705,3765 ; v1(1645,2150) v1(1710,2150) 1850,2010 2085,2010 2110,2040 2205,2040 2235,2010 2290,2010 ; JP4.2@3800,4400 pad.0@5363.78,4400
  Top Layer w80: v1(3696,2876) v1@3917.8,2874.68
  Bottom Layer w10: CON1.11B@1537.76,1552.76 1475,1490 1475,1165.55 CON1.9B@1537.8,1102.76 ; CON1.11B@1537.8,1552.76 1590,1604.96 1590,1855 1565,1880 1565,2070 v1(1645,2150) ; CON1.9@1537.8,1722.76 1587.24,1722.76 ; v1@3917.11,2876 v1(3918.11,2875) ; 4574.25,2300 4574.25,2300.75
  Bottom Layer w20: D20.3@1248.03,2480.95 1244.06,2480.95 1185,2540 1185,2786.81 D22.2@1251.97,2853.78 ; D21.3@1397.64,2480.95 1699.06,2480.95 ; 4445.28,2429.72 4574.25,2300.75 ; 4574.25,2300 S2.2@4650,2300 ; v1(5000,2325) v1(5120,2325)
  Bottom Layer w39: U6.1@1285,3085 1285,3153.15
  Bottom Layer w40: 1285,3153.15 CON2.3A@1349.02,3217.17 ; 3910,2935 4020.12,3045.12 ; v1(3918.11,2875) 3988.11,2805 4040,2805 4075,2770 4075,2675 4200,2550 4315,2550 4380,2615 4455,2615 4495,2575 4495,2480 v1(4400,2385) ; 3918.11,2928.11 4035.12,3045.12 ; v1(5000,3145) 5000,3275 v1(5075,3350)
  Bottom Layer w60: 1070,2175 1070,3735 1432.8,4097.8 C1.2@1435,4097.8 ; 1070,2200 1070,1465 1222.24,1312.76 CON1.3B@1260,1312.76 ; 1070,2230 1070,2275 ; 1072.24,1472.76 CON1.7B@1260,1472.76 1327.76,1472.76 ; 1072.24,1932.76 CON1.3@1260,1932.76 ; 1072.76,2092.76 CON1.7@1260,2092.76 1327.76,2092.76 ; CON1.6B@1330,1432.76 CON1.8B@1330,1512.76 ; CON1.6@1330,2052.76 CON1.8@1330,2132.76 ; C3.1@2682.32,3782.2 C3.1@2700,3790 ; v1(3690,3615) 4030,3615 4070,3575 v1(4070,3340) 4073.05,3340 4120,3293.05 4120,3235 4035.12,3150.12 4035.12,3045.12 ; 3738,2835 3844,2835 ; v1@3917.11,2876 v1(3696,2876) 3778,2794 3837.11,2794 v1(3918.11,2875) 3918.11,2928.11 ; CON3.11@4973.54,1434.8 5070,1535 5070,1690 ; CON3.8@5013.54,1244.8 5013.54,1478.54 ; 5013.54,1345 5400,1345 5423.54,1368.54 CON3.9@5423.54,1434.8 5424.8,1434.8 5500,1510 5500,2170 ; pad.0@5393.7,2098.7 pad.0@5423.54,2068.86 ; pad.0@5393.7,4370.08 pad.0@5400,4363.78 ; 5500,3200 5500,3345
  Bottom Layer w70: v1@3700.18,3619.82 3080,4240 3240,4400 5394.25,4400 pad.0@5403.7,4409.45
  Bottom Layer w80: CON2.2@1270.28,3413.39 1270,3300 CON2.3A@1344.02,3222.17 ; v1(1645,2150) v1(1710,2150) ; v1@1700,2160 1700,2640 2165,3105 2165,3375 2375,3585 2585,3585 2700,3700 C3.1@2700,3790 ; 2540,1695 5030,1690 JJ3.1@5090,1690 ; C4.2@2575,3782.2 C3.1@2682.32,3782.2 ; C3.1@2700,3799.88 2774.88,3799.88 2815,3840 2815,4195 2860,4240 3080,4240 ; pad.0@5363.78,4400 5393.7,4370.08 5394.92,4370.08 5496.18,4268.82 pad.0@5495,2020
  other v1: 2035,2565 1620,3855
I\E\: U1.50 U2.2 | length 2024.2
  Top Layer w10: U2.2@2482.36,1890 2530,1890 2575,1935 2575,2055 2585,2065 2585,2200 2635,2250 2695,2250 2805,2360 2805,2775 3145,3115 3190,3115 3220,3145 3315,3145 3355,3185 3535,3185 3563.78,3156.22 U1.50@3563.78,3154.21
J0: JP4.5 U1.47 | length 3034.1
  Top Layer w10: v1(3075,3985) 3100,3960 v1(4200,3960) ; v1(3140,3530) 3140,3485 v1(3320,3305) ; v1(3605,3045) 3605,3085 3622.83,3102.83 U1.47@3622.83,3154.21
  Bottom Layer w10: v1(3075,3985) 3075,3785 3025,3735 3025,3570 3065,3530 v1(3140,3530) ; v1(3320,3305) 3410,3215 3425,3215 v1@3595,3045 ; JP4.5@4000,4300 4050,4250 4195,4250 4230,4215 4230,3995 4230,3990 v1(4200,3960)
J1: JP4.7 U1.29 | length 1389.2
  Top Layer w10: v1(3815,3690) 3815,3680 3895,3600 v1(3895,3470) ; U1.29@3977.17,3154.21 3977.17,3287.17 v1(4005,3315) ; v1(4100,4175) JP4.7@4100,4300
  Bottom Layer w10: v1(3815,3690) 3815,3890 v1(4100,4175) ; v1(3895,3470) 3895,3365 3945,3315 v1(4005,3315)
J2: JP4.9 U1.1 | length 2845.9
  Top Layer w10: U1.1@4099.21,2618.78 4099.21,2615.79 4120,2595 4780,2595 4860,2675 4860,2800 4890,2830 4890,2920 4845,2965 v1(4735,2965) ; v1(4300,3995) 4390,3995 v1(4575,3810)
  Bottom Layer w10: JP4.9@4200,4300 4265,4235 4265,4030 v1(4300,3995) ; v1(4575,3810) 4735,3650 v1(4735,2965)
J3: JP4.11 U1.14 | length 1915
  Top Layer w10: U1.14@4099.21,2874.68 4294.68,2874.68 4450,3030 4450,3235 4650,3435 4650,3630 4345,3935 v1(4345,3945)
  Bottom Layer w10: JP4.11@4295,4300 4295,4065 4345,4015 v1(4345,3945)
J4: JP4.13 U1.27 | length 2119.5
  Top Layer w10: v1(3880,3690) 3950,3620 4075,3620 4225,3620 4350,3495 4350,3355 4310,3315 4165,3315 4065,3215 4035,3215 4016.54,3196.54 U1.27@4016.54,3154.21
  Bottom Layer w10: v1(3880,3690) 3925,3735 3965,3735 4125,3895 4365,3895 4395,3925 4395,3955 JP4.13@4395,4300
J5: JP4.15 U1.19 | length 1980.1
  Top Layer w10: U1.19@4099.21,2973.11 4198.11,2973.11 4285,3060 4285,3100 4235,3150 v1(4235,3195) ; JP4.15@4500,4300 4650,4150 v1(4775,4150)
  Bottom Layer w10: v1(4235,3195) 4235,3405 4155,3485 4155,3565 4295,3705 4740,4150 v1(4775,4150)
J6: JP4.17 U1.17 | length 2154
  Top Layer w10: U1.17@4099.21,2933.74 4238.74,2933.74 4350,3045 v1(4350,3140) ; JP4.17@4600,4300 4695,4205 v1(4870,4205)
  Bottom Layer w10: v1(4350,3140) 4360,3150 4360,3350 4205,3505 4205,3545 4735,4075 4810,4075 4870,4135 v1(4870,4205)
K1: JP4.1 S1.1 U1.4 | length 2973.5
  Top Layer w10: JP4.1@3800,4300 4000,4100 4500,4100 v1(4700,3900) ; U1.4@4099.21,2677.83 4192.17,2677.83 4200,2670 4635,2670 4725,2760 4725,2790 S1.1@4835,2900
  Bottom Layer w10: v1(4700,3900) 4835,3765 S1.1@4835,2900
K2: JP4.3 S2.1 U1.5 | length 3030.6
  Top Layer w10: JP4.3@3900,4300 4070,4130 4570,4130 v1(4715,3985) ; U1.5@4099.21,2697.52 4217.48,2697.52 4220,2695 4625,2695 4695,2765 4695,2805 4649.28,2850.72 S2.1@4649.28,2900.72
  Bottom Layer w10: S2.1@4649.28,2900.72 4740.72,2900.72 4805,2965 4805,3700 4640,3865 4640,3915 4710,3985 v1(4715,3985)
LED0: Q6.1 U1.24 | length 4770.9
  Top Layer w10: Q6.1@1617.4,2746.26 1617.4,2747.6 1590,2775 1590,3155 1625,3190 1625,3385 1665,3425 2275,3425 2395,3545 2735,3545 3050,3860 3645,3860 4055,3860 4120,3795 4150,3795 4380,3795 4575,3600 4575,3470 4345,3240 4205,3240 4140,3175 4140,3125 4160,3105 4160,3085 4146.54,3071.54 U1.24@4099.21,3071.54
LED1: Q7.1 U1.25 | length 4695.5
  Top Layer w10: U1.25@4099.21,3091.22 4100,3175 4190,3265 4335,3265 4550,3480 4550,3590 4370,3770 4140,3770 4105,3770 4040,3835 3660,3835 3060,3835 2745,3520 2405,3520 2285,3400 1675,3400 1650,3375 1650,3180 1620,3150 1620,2870 1670,2820 1715,2820 1772.4,2762.6 Q7.1@1772.4,2746.26 ; Q7.1@1772.4,2746.26 1772.4,2747.6 Q7.1@1772.4,2746.26
LED2: Q8.1 U1.26 | length 4826.9
  Top Layer w10: Q8.1@1462.4,2746.26 1462.4,2757.4 1560,2855 1560,3165 1600,3205 1600,3305 1600,3395 1655,3450 2265,3450 ; 2240,3450 2265,3450 ; v1(3950,3690) 3995,3645 4085,3645 4235,3645 4320,3560 4375,3505 4375,3345 4320,3290 4175,3290 U1.26@4039.21,3154.21 ; v1(4140,3840) 4095,3885 3630,3885 3040,3885 2725,3570 2385,3570 2265,3450 ; U1.26@4039.21,3154.21 U1.26@4036.22,3154.21 U1.26@4039.21,3154.21
  Bottom Layer w10: v1(3950,3690) 3990,3690 v1(4140,3840)
LED3: Q9.1 U1.15 | length 6267
  Top Layer w10: v1(1615,2325) 1655,2325 1725,2395 1760,2395 1776.26,2411.26 Q9.1@1776.26,2422.6 ; v1(1675,2900) 1650,2925 1650,3140 1675,3165 1675,3360 1690,3375 2300,3375 2420,3495 2765,3495 2805,3535 v1(2900,3535) ; v1(3005,3955) 3025,3935 3590,3935 4150,3935 4240,3845 4400,3845 4625,3620 4625,3450 4425,3250 4425,3045 4274.37,2894.37 U1.15@4099.21,2894.37
  Bottom Layer w10: v1(1615,2325) 1370,2325 1340,2355 1340,2635 1605,2900 v1(1675,2900) ; v1(2900,3535) 2900,3665 3005,3770 v1(3005,3955)
LED4: Q10.1 U1.16 | length 4969.9
  Top Layer w10: Q10.1@1388.74,2887.4 1427.4,2887.4 1530,2990 1530,3175 1575,3220 1575,3405 1645,3475 2255,3475 2375,3595 2715,3595 3030,3910 3610,3910 4140,3910 4230,3820 4390,3820 4600,3610 4600,3460 4400,3260 4400,3060 4254.06,2914.05 U1.16@4099.21,2914.05
LEDA: Q1.2 Q1.5 U1.48 | length 1969.2
  Top Layer w10: Q1.5@2180.51,2465 2220,2465 2235,2480 2235,2530 2265,2560 v1@2265,2565 ; v1(2480,2780) 2525,2780 2530,2785 2745,2785 2775,2815 3125,3165 3170,3165 3200,3195 3295,3195 3335,3235 3580,3235 3603.15,3211.85 U1.48@3603.15,3154.21
  Top Layer w13: Q1.2@2105,2465 Q1.5@2201,2465
  Bottom Layer w10: v1@2265,2565 2320,2565 2480,2725 v1(2480,2780)
  other v1: 2270,2565
LEDAO: CON4.9 CON4.11 CON5.9 CON5.11 CON6.9 CON6.11 CON7.9 CON7.11 JJ3.2 Q1.3 Q1.6 | length 5550.8
  Top Layer w10: CON7.11@2040.16,1434.8 2160.35,1555 2170.35,1565 2380,1565 2390,1555 CON7.9@2510.16,1434.8 ; Q1.3@2105,2438 2105,2410 2135,2380 v1(2190,2380) ; Q1.6@2180.51,2490.59 2180.51,2535.51 v1@2200,2555 ; CON7.9@2494.8,1434.8 CON7.9@2510.16,1434.8 2624.8,1434.8 2625.2,1434.8 2675,1385 2720,1385 2769.8,1434.8 CON6.11@2788.5,1434.8 ; CON6.11@2770,1435 2788.31,1435 CON6.11@2788.5,1434.8 ; CON6.9@3220.2,1434.8 3354.8,1434.8 3405,1485 3455,1485 3505.2,1434.8 CON5.11@3516.85,1434.8 3799.8,1434.8 3850,1485 3900,1485 3950.2,1434.8 4079.8,1434.8 4130,1485 4195,1485 CON4.11@4245.2,1434.8 ; CON6.9@3238.5,1434.8 3188.7,1385 3125,1385 3075.2,1434.8 3074.8,1434.8 CON6.11@2788.5,1434.8 ; CON4.11@4245.39,1435 4530,1435 4580,1485 4695,1485 ; CON4.9@4695.2,1434.8 4695,1485 ; v1(5020,1770) 5020,1600 5035,1585 5035,1535 5010,1510 4810,1510 4785,1485 4695,1485
  Bottom Layer w10: CON7.11@2060.16,1434.8 2005.35,1380 1935,1380 1905,1410 1905,1580 2160,1835 2185,1835 2260,1910 2260,2300 v1@2195,2365 ; v1(2190,2380) v1@2190,2555 ; v1(5020,1770) 5020,1800 5042.4,1822.4 5082.6,1822.4 5100,1805 JJ3.2@5100,1782.4
  other v1: 2180,2555
LEDB0: U1.51 U7.2 | length 842.7
  Top Layer w10: U7.2@2827.09,3055 2945,3055 3105,3215 3145,3215 v1(3195,3265) ; v1(3425,3115) 3448.78,3091.22 U1.51@3500.79,3091.22
  Bottom Layer w10: v1(3195,3265) 3295,3165 3375,3165 v1(3425,3115) v1@3425,3125
LEDB0O: CON4.12 R33.8 | length 4419.4
  Top Layer w10: v1(1960,1570) 1890,1500 1890,1400 1935,1355 2100,1355 2145,1400 2145,1460 2195,1510 2240,1510 2275,1475 2275,1435 2400,1310 3420,1310 3470,1360 4080.39,1360 CON4.12@4155.2,1434.8
  Bottom Layer w10: v1(1960,1570) 1960,1575 2195,1810 2285,1900 2285,2320 2360,2395 2360,2565 2525,2730 2525,2805 2505,2825 2430,2825 2392.76,2862.24 R33.8@2392.76,2916.53
LEDB1: U1.52 U7.3 | length 820.1
  Top Layer w10: U7.3@2827.09,3105 2960,3105 3120,3265 v1(3125,3265) ; v1(3365,3095) 3388.46,3071.54 U1.52@3500.79,3071.54
  Bottom Layer w10: v1(3125,3265) 3250,3140 3320,3140 v1(3365,3095)
LEDB1O: CON4.10 R34.5 | length 4463.4
  Top Layer w10: v1@2225,1465 2225,1450 2390,1285 2680,1285 2840,1125 3135,1125 3180,1170 3525,1170 3570,1125 3860,1125 4065,1330 4500.39,1330 CON4.10@4605.2,1434.8
  Bottom Layer w10: v1(2215,1465) 2260,1465 2280,1445 2350,1445 2390,1485 2390,1635 2485,1730 2485,2130 2610,2255 2610,2560 2700,2650 2700,2880 2692.24,2887.76 R34.5@2692.24,2921.53
LEDB2: U1.70 U7.4 | length 1304.7
  Top Layer w10: U7.4@2827.09,3155 2950,3155 3105,3310 3220,3310 v1(3265,3265) ; U1.70@3500.79,2717.2 3557.2,2717.2 3575,2735 v1(3575,2760)
  Bottom Layer w10: v1(3265,3265) 3340,3190 3415,3190 3470,3135 3470,2865 v1(3575,2760)
LEDB2O: CON5.12 R33.7 | length 3701.3
  Top Layer w10: v1(2030,1570) 2030,1545 1985,1500 1950,1500 1915,1465 1915,1410 1945,1380 2080,1380 2115,1415 2115,1470 2175,1530 2185,1540 2370,1540 2390,1520 2390,1485 2370,1465 2370,1410 2420,1360 3350,1360 3424.8,1434.8 CON5.12@3426.85,1434.8
  Bottom Layer w10: v1(2030,1570) 2030,1610 2205,1785 2310,1890 2310,2300 2390,2380 2390,2555 2550,2715 2550,2815 2515,2850 2450,2850 2424.25,2875.75 R33.7@2424.25,2916.53
LEDB3: U1.28 U7.5 | length 2078.2
  Top Layer w10: U7.5@2827.09,3205 2910,3205 3050,3345 3050,3640 3120,3710 3665,3710 3740,3635 3740,3590 v1(3695,3545) ; U1.28@3996.85,3154.21 3996.85,3216.85 v1(4045,3265)
  Bottom Layer w10: v1(3695,3545) 3695,3465 3895,3265 v1(4045,3265)
LEDB3O: CON5.10 R34.6 | length 3277
  Top Layer w10: v1(2330,1495) 2330,1415 2410,1335 3390,1335 3440,1385 3827.05,1385 CON5.10@3876.85,1434.8
  Bottom Layer w10: v1(2330,1495) 2330,1610 2460,1740 2460,2145 2585,2270 2585,2570 2675,2660 2675,2865 2661,2879 R34.6@2661,2922
LEDB4: U1.6 U7.6 | length 3548.4
  Top Layer w10: U7.6@2827.09,3255 2925,3255 3025,3355 3025,3655 3105,3735 3730,3735 3980,3735 4045,3670 4095,3670 4245,3670 4400,3515 4400,3440 v1(4420,3420) ; U1.6@4099.21,2717.2 4217.2,2717.2 4220,2720 4580,2720 v1(4600,2740)
  Bottom Layer w10: v1(4420,3420) 4425,3415 4425,3085 4360,3020 4360,2830 4425,2765 4575,2765 v1(4600,2740)
LEDB4O: CON6.12 R33.6 | length 2319.4
  Top Layer w10: v1@2110,1580 v1(2100,1570) 2120,1590 2390,1590 2400,1580 2495,1485 2650,1485 2698.5,1436.5 CON6.12@2698.5,1434.8
  Bottom Layer w10: v1(2100,1570) 2100,1645 2215,1760 2335,1880 2335,2285 2420,2370 2420,2550 2575,2705 2575,2825 2525,2875 2465,2875 2456,2884 R33.6@2456,2922
LEDB5: U1.7 U7.7 | length 3662.7
  Top Layer w10: U7.7@2827.09,3305 2940,3305 3000,3365 3000,3670 3090,3760 3715,3760 3995,3760 4060,3695 4105,3695 4260,3695 4345,3610 4450,3505 v1(4450,3485) ; U1.7@4099.21,2736.89 4191.89,2736.89 4200,2745 4535,2745 4575,2785 v1(4650,2785)
  Bottom Layer w10: v1(4450,3485) 4450,3460 4465,3445 4465,3085 4385,3005 4385,2845 4440,2790 4640,2790 4645,2785 v1(4650,2785) v1@4645,2790
LEDB5O: CON6.10 R34.7 | length 2444.1
  Top Layer w10: v1(2270,1635) 2380,1635 2390,1625 2505,1510 2710,1510 2735,1485 3100,1485 3148.5,1436.5 CON6.10@3148.5,1434.8
  Bottom Layer w10: v1(2270,1635) 2320,1635 2435,1750 2435,2165 2560,2290 2560,2580 2649.6,2669.6 2650,2855 2629.25,2875.75 R34.7@2629.25,2921.53
LEDB6: U1.8 U7.8 | length 3411.6
  Top Layer w10: U7.8@2827.09,3355 2940,3355 2975,3390 2975,3680 3080,3785 3695,3785 4010,3785 4075,3720 4120,3720 4300,3720 4385,3635 v1(4435,3585) ; U1.8@4099.21,2756.57 4166.57,2756.57 4180,2770 4445,2770 v1(4510,2835)
  Bottom Layer w10: v1(4510,2835) 4505,2830 4440,2830 4410,2860 4410,2990 4490,3070 4490,3440 4495,3445 4495,3510 v1@4435,3570 ; v1@4435,3570 v1(4435,3585) ; v1@4435,3570 v1(4435,3585) ; v1@4435,3570 v1(4435,3585)
LEDB6O: CON7.12 R33.5 | length 1897.3
  Bottom Layer w10: CON7.12@1970.16,1434.8 1974.8,1434.8 2055,1515 2120,1515 2150,1545 2150,1620 2235,1705 2315,1705 2330,1720 2330,1785 2385,1840 2385,2185 2510,2310 2510,2605 2600,2695 2600,2835 2535,2900 2508.78,2900 R33.5@2487.24,2921.53
LEDB7: U1.9 U7.9 | length 3262.6
  Top Layer w10: U7.9@2827.09,3405 2915,3405 2950,3440 2950,3690 3070,3810 3680,3810 4025,3810 4090,3745 4130,3745 4345,3745 4430,3660 4505,3585 v1(4505,3570) ; U1.9@4099.21,2776.26 4141.26,2776.26 4160,2795 4370,2795 v1(4455,2880)
  Bottom Layer w10: v1(4455,2880) 4455,2995 4525,3065 4525,3550 v1(4505,3570) ; v1@4505,3555 v1(4505,3570) ; v1@4520,3555 v1(4505,3570)
LEDB7O: CON7.10 R34.8 | length 2048.4
  Bottom Layer w10: R34.8@2597.76,2921.53 2597.76,2872.24 2625,2845 2625,2685 2535,2595 2535,2385 2535,2300 2410,2175 2410,1760 2330,1680 2250,1680 2175,1605 2175,1525 2170,1520 2170,1415 2190,1395 2220,1395 2245,1420 2385,1420 CON7.10@2399.8,1434.8 ; CON7.10@2399.8,1434.8 CON7.10@2420.16,1434.8 CON7.10@2399.8,1434.8
NetC3_2: C3.2 C4.1 F1.1 L1.2 U3.1 | length 507.3
  Top Layer w60: C4.1@2575,3920 2635,3920 2703.5,3988.5 F1.1@2703.5,4125
  Bottom Layer w60: C4.1@2575,3920 2690.12,3920 C3.2@2700,3910.12 ; C3.2@2705,3915.12 v1(2705,4000)
NetC10_1: C10.1 U1.34 Y1.1 | length 430.5
  Top Layer w10: Y1.1@3795,3445 3825,3415 3878.74,3361.26 U1.34@3878.74,3154.21
  Bottom Layer w10: Y1.1@3795,3445 3795,3507.6 C10.1@3825,3537.6
NetC11_1: C11.1 U1.33 Y1.2 | length 441.6
  Top Layer w10: U1.33@3898.43,3154.21 3898.43,3203.43 3905,3210 3905,3362.87 Y1.2@3987.13,3445 Y1.2@3983.43,3441.3
  Bottom Layer w10: C11.1@3960,3542.6 3987.13,3515.47 Y1.2@3987.13,3445
NetC12_1: C12.1 U4.5 | length 258.4
  Top Layer w10: U4.5@5183.35,3480 5245,3480 5265,3460 5365,3460 5397.4,3427.6 C12.1@5397.4,3405
NetC12_2: C12.2 U4.4 | length 149.6
  Top Layer w10: U4.4@5183.35,3430 5245,3430 5270,3405 C12.2@5322.6,3405
NetC13_1: C13.1 U4.1 | length 145.5
  Top Layer w10: U4.1@5183.35,3280 5307.6,3280 C13.1@5322.6,3295
NetC13_2: C13.2 U4.3 | length 262.5
  Top Layer w10: U4.3@5183.35,3380 5230,3380 5260,3350 5365,3350 5397.4,3317.6 C13.2@5397.4,3295
NetC14_2: C14.2 U4.2 | length 472.1
  Top Layer w10: U4.2@5183.35,3330 5125,3330 5110,3315 5110,3255 5125,3240 5370,3240 5397.4,3212.6 C14.2@5397.4,3185
NetC16_2: C16.2 U4.6 | length 145.5
  Top Layer w10: U4.6@5183.35,3530 5245,3530 5260,3515 C16.2@5322.6,3515
NetC17_2: C17.2 U1.98 | length 362
  Top Layer w10: U1.98@3996.85,2555.79 3996.85,2483.15 4020,2460 4090,2390 C17.2@4247.6,2390
NetC19_2: C19.2 L2.2 U1.100 | length 630.4
  Top Layer w10: U1.100@4036.22,2556.22 U1.100@4036.22,2555.79 4054.21,2555.79 4045,2555.79 ; C19.2@4365.12,2480 4395,2480 4505.12,2369.88 L2.2@4510,2369.88 ; L2.2@4475.24,2394.88 L2.2@4510,2394.88
  Top Layer w20: 4045,2555.79 4335,2555 4365.12,2524.88 C19.2@4365.12,2480
NetCON1_10: CON1.10 R20.1 | length 1733.7
  Top Layer w10: CON1.10@1537.8,1812.76 1537.8,1797.2 1585,1750 2085,1750 2130,1705 2270,1705 2315,1705 2345,1735 2345,1780 2345,2025 2455,2135 2455,2255 2580,2380 2620,2380 2645,2405 R20.1@2645,2447.6
NetCON1_10B: CON1.10B R21.1 | length 352.7
  Bottom Layer w10: CON1.10B@1537.8,1192.76 1537.8,1390.2 R21.1@1647.6,1500
NetCON1_11: CON1.11 R19.1 | length 1122
  Top Layer w10: CON1.11@1537.8,2172.76 1735,2370 2060,2370 2100,2330 2264.61,2329.61 2320,2385 2432.4,2385 R19.1@2495,2447.6 R19.1@2495,2430
NetCON1_12B: CON1.12B Q4.2 R23.1 R32.2 | length 2462.1
  Top Layer w10: v1(2031.61,3128.39) 2057.4,3102.6 Q4.2@2134.21,3102.6 ; Q4.2@2134.21,3105.98 Q4.2@2134.21,3102.6 ; R23.1@2134.21,3168.39 Q4.2@2134.21,3102.6
  Bottom Layer w10: CON1.12B@1520,1642.76 1520,1645 1470,1695 1470,2095 1305,2260 1305,2685 1565,2945 1700,2945 1720,2925 1720,2910 1755,2875 1825,2875 2031.61,3081.61 v1(2031.61,3128.39) R32.2@1888.23,3128.39 ; CON1.12B@1537.24,1642.76 CON1.12B@1537.8,1642.76
NetCON3_10: CON3.10 R29.1 | length 1063.8
  Top Layer w10: R29.1@5190,2422.6 5170,2402.6 5170,1805 5333.54,1641.46 CON3.10@5333.54,1434.8
NetCON3_12: CON3.12 R31.1 | length 1249.1
  Top Layer w10: CON3.12@4883.54,1434.8 4933.35,1385 5000,1385 5085,1470 5090,1475 5090,2175 5085,2180 5070,2195 5070,2407.6 R31.1@5055,2422.6 R31.1@5077.6,2422.6
NetD1_2: D1.2 L1.1 U3.7 | length 1195.7
  Top Layer w60: L1.1@1770,4255 1902,4255 L1.1@1905,4252 1767,4252 1705,4190 1705,3940 1945,3700 2005,3700 2100,3605 U3.7@2100,3555
NetD20_1: D20.1 R26.3 | length 324.2
  Top Layer w10: D20.1@1248.03,2380.95 1297.09,2430 1435,2430 1484.25,2479.25 R26.3@1531.54,2479.25
NetD20_2: D20.2 R26.2 | length 312.6
  Top Layer w10: D20.2@1248.03,2580.95 1298.98,2530 1460,2530 1479.25,2510.75 1480.75,2510.75 R26.2@1531.54,2510.75
NetD21_1: D21.1 R26.4 | length 162.3
  Top Layer w10: D21.1@1397.64,2380.95 1465.94,2380.95 1531.54,2446.53 R26.4@1531.54,2447.76
NetD21_2: D21.2 R26.1 | length 150.6
  Top Layer w10: D21.2@1397.64,2580.95 1494.06,2580.95 1531.54,2543.46 R26.1@1531.54,2542.24
NetD22_1: D22.1 R27.1 | length 389.4
  Top Layer w10: D22.1@1251.97,2753.78 1253.78,2753.78 1310,2810 1310,2945 R27.1@1432.4,3067.4
NetJP1_1: JP1.1 R5.2 R6.2 | length 455.5
  Top Layer w10: R5.2@1950,2300 R5.2@1950,2291.61 2058.39,2291.61 JP1.1@2100,2250 2150,2300 2302.6,2300 R6.2@2327.6,2275 ; R6.2@2312.6,2250 R6.2@2327.6,2265
NetJP2_2: JP2.2 R4.2 R5.1 | length 460.4
  Top Layer w10: R5.1@1950,2120 R5.1@1950,2118.39 2068.39,2118.39 JP2.2@2100,2150 2150,2100 2302.6,2100 2332.6,2130 R4.2@2332.6,2160
NetQ1_1: Q1.1 R25.2 | length 135
  Top Layer w16: R25.2@1970,2490 Q1.1@2105,2490
NetQ1_4: Q1.4 R24.1 | length 145.5
  Top Layer w10: Q1.4@2180.51,2439.41 R24.1@2326.02,2439.41
NetQ2_3: Q2.3 R19.2 | length 81.3
  Top Layer w10: R19.2@2495,2522.4 Q2.3@2495,2603.74
NetQ3_3: Q3.3 R20.2 | length 76.3
  Top Layer w10: R20.2@2645,2522.4 Q3.3@2645,2598.74
NetQ4_1: Q4.1 Q5.3 R23.2 | length 353.7
  Top Layer w10: Q5.3@1967.17,3029.29 2002.52,3029.29 2026.61,3053.39 2186.61,3053.39 2209.02,3075.79 Q4.1@2209.02,3102.6 R23.2@2209.02,3168.39
NetQ4_3: Q4.3 Q5.1 R22.1 | length 1321.4
  Top Layer w10: Q5.1@1786.06,3029.29 1715.71,3029.29 1680,3065 1680,3130 1700,3150 1700,3340 1710,3350 2160,3350 2192.4,3317.6 R22.1@2192.4,3300 2220,3300 2250,3270 2250,3045 2209.17,3004.17 2174.02,3003.35 Q4.3@2175.79,3003.35
NetQ6_3: Q6.3 R26.7 | length 201
  Top Layer w10: Q6.3@1580,2653.74 1640,2593.74 1640,2525 1625.75,2510.75 R26.7@1598.46,2510.75
NetQ7_3: Q7.3 R26.6 | length 252.6
  Top Layer w10: R26.6@1598,2479 1634,2479 1665,2510 1735,2580 Q7.3@1735,2653.74
NetQ8_3: Q8.3 R26.8 | length 230.9
  Top Layer w10: Q8.3@1425,2653.74 1466.26,2653.74 1525,2595 1565,2595 1598.46,2561.53 R26.8@1598.46,2542.24
NetQ9_3: Q9.3 R26.5 | length 90.3
  Top Layer w10: R26.5@1598.46,2447.76 1671.5,2447.76 Q9.3@1683.74,2460
NetQ10_3: Q10.3 R27.2 | length 346.3
  Top Layer w10: R27.2@1445,2992.6 1397.6,2992.6 1340,2935 1340,2865 1355,2850 Q10.3@1481.26,2850
NetQ11_3: Q11.3 Q12.1 R29.2 R30.2 | length 567.6
  Top Layer w10: R29.2@5190,2512.4 5135,2567.4 5135,2620 5072.6,2682.4 R30.2@5055,2682.4 5101.26,2728.66 Q12.1@5101.26,2857.6 5185.35,2857.6 Q11.3@5222.76,2895
NetQ12_3: Q12.3 R31.2 | length 424
  Top Layer w10: Q12.3@5008.74,2895 5008.74,2743.74 5000,2735 5000,2552.4 R31.2@5055,2497.4
NetR33_1: R33.1 U7.18 | length 245.8
  Top Layer w10: v1(2370,3060) 2370,3090 2385,3105 U7.18@2462.91,3105
  Bottom Layer w10: v1(2370,3060) 2355,3045 2355,2990 2361.54,2983.46 R33.1@2392.76,2983.46
NetR33_2: R33.2 U7.16 | length 319.3
  Top Layer w10: v1(2370,3155) 2370,3175 2400,3205 U7.16@2462.91,3205
  Bottom Layer w10: v1(2370,3155) 2370,3125 2415,3080 2415,3025 2424.25,3015.75 R33.2@2424.25,2983.47
NetR33_3: R33.3 U7.14 | length 417.7
  Top Layer w10: v1@2370,3250 2425,3305 U7.14@2462.91,3305
  Bottom Layer w10: v1@2370,3250 2420,3200 2420,3115 2440,3095 2440,3040 2455.75,3024.25 R33.3@2455.75,2983.47
  other v1: 2370,3240
NetR33_4: R33.4 U7.12 | length 551.3
  Top Layer w10: v1(2370,3320) 2370,3365 2410,3405 U7.12@2460,3405
  Bottom Layer w10: v1(2370,3320) 2395,3320 2465,3250 2465,3050 2487.24,3027.76 R33.4@2487.24,2983.47
NetR34_1: R34.1 U7.11 | length 627.1
  Top Layer w10: U7.11@2460,3455 2515,3455 2560,3410 v1(2560,3380)
  Bottom Layer w10: v1(2560,3380) 2495,3315 2495,3065 2560,3000 2581.22,3000 R34.1@2597.76,2983.46
NetR34_2: R34.2 U7.13 | length 527.5
  Top Layer w10: U7.13@2462.91,3355 2510,3355 2560,3305 v1(2560,3280)
  Bottom Layer w10: v1(2560,3280) 2520,3240 2520,3075 2565,3030 2610,3030 2629.25,3010.75 R34.2@2629.25,2983.47
NetR34_3: R34.3 U7.15 | length 428.6
  Top Layer w10: U7.15@2462.91,3255 2510,3255 2565,3200 v1(2565,3180)
  Bottom Layer w10: v1(2565,3180) 2550,3165 2550,3080 2575,3055 2635,3055 2660.75,3029.25 R34.3@2660.75,2983.47
NetR34_4: R34.4 U7.17 | length 338
  Top Layer w10: U7.17@2462.91,3155 2510,3155 2565,3100 v1(2595,3100)
  Bottom Layer w10: v1(2595,3100) 2640,3100 2692.24,3047.76 R34.4@2692.24,2983.47
OE: Q2.1 U1.49 U2.3 | length 3303
  Top Layer w10: Q2.1@2532.4,2696.26 2532.4,2697.4 2570,2735 2720,2735 2730,2725 2730,2405 2655,2330 2605,2330 2505,2230 2505,2110 2395,2000 2395,1960 2415,1940 U2.3@2482.36,1940 2530,1940 2550,1960 2550,2070 2560,2080 2560,2210 2625,2275 2680,2275 2780,2375 2780,2785 3135,3140 3180,3140 3210,3170 3305,3170 3345,3210 3570,3210 3583.46,3196.54 U1.49@3583.46,3154.21
PDI: CON3.2 U1.21 | length 2517.2
  Top Layer w10: U1.21@4099.21,3012.48 4172.48,3012.48 v1(4240,3080) ; CON3.2@5253.54,1244.8 5270,1261.26 5270,1465 5285,1480 v1(5285,1620)
  Bottom Layer w10: v1(4240,3080) 4240,2865 4390,2715 4505,2715 4855,2365 4900,2320 4900,2290 5060,2130 5060,1970 5285,1745 v1(5285,1620)
PDO: CON3.6 U1.22 | length 2644.9
  Top Layer w10: v1(4010,2865) 4010,2885 3975,2920 3975,2965 4042.17,3032.17 U1.22@4099.21,3032.17 ; v1(5195,1620) 5195,1550 5210,1535 5210,1360 CON3.6@5094.8,1244.8 ; CON3.6@5094.8,1244.8 CON3.6@5093.54,1244.8 CON3.6@5094.8,1244.8
  Bottom Layer w10: v1(4010,2865) 4050,2865 4255,2660 4485,2660 4725,2420 4725,2295 4815,2205 4905,2205 5010,2100 5010,1950 5155,1805 5155,1660 v1(5195,1620)
R\E\S\E\T\: C9.1 CON3.3 R1.1 U1.30 | length 3949.2
  Top Layer w10: U1.30@3957.48,3154.21 3957.48,3297.48 3957.48,3332.48 3990,3365 4025,3365 4057.6,3397.6 R1.1@4172.6,3397.6 ; R1.1@4155,3397.6 4187.6,3397.6 4202.6,3397.6 4267.4,3462.4 C9.1@4295,3462.4 ; v1(4250,3525) 4250,3455.38 4255.19,3450.19 ; CON3.3@5213.54,1174.8 5213.54,1171.46 5265,1120 5320,1120 5525,1325 5525,1500 5405,1620 5405,1690 v1(5370,1725)
  Bottom Layer w10: v1(4250,3525) 4400,3375 4400,3115 4335,3050 4335,2815 4410,2740 4520,2740 4865,2395 4940,2320 4940,2295 5090,2145 5090,1975 5340,1725 v1(5370,1725)